# Altium PCB PCB1.PcbDoc
Units mm, origin at the board's own origin, x right, y up, seen from the top; angles counter-clockwise.
Board outline 51.26 x 60.5 mm, 4 copper layers (Component Side, Ground Plane, Power Plane, Solder Side), stack 1.606 mm thick; 65 components, 40 nets, 204 pads, 75 vias.
Unrouted connection lines stored in the file: 7.
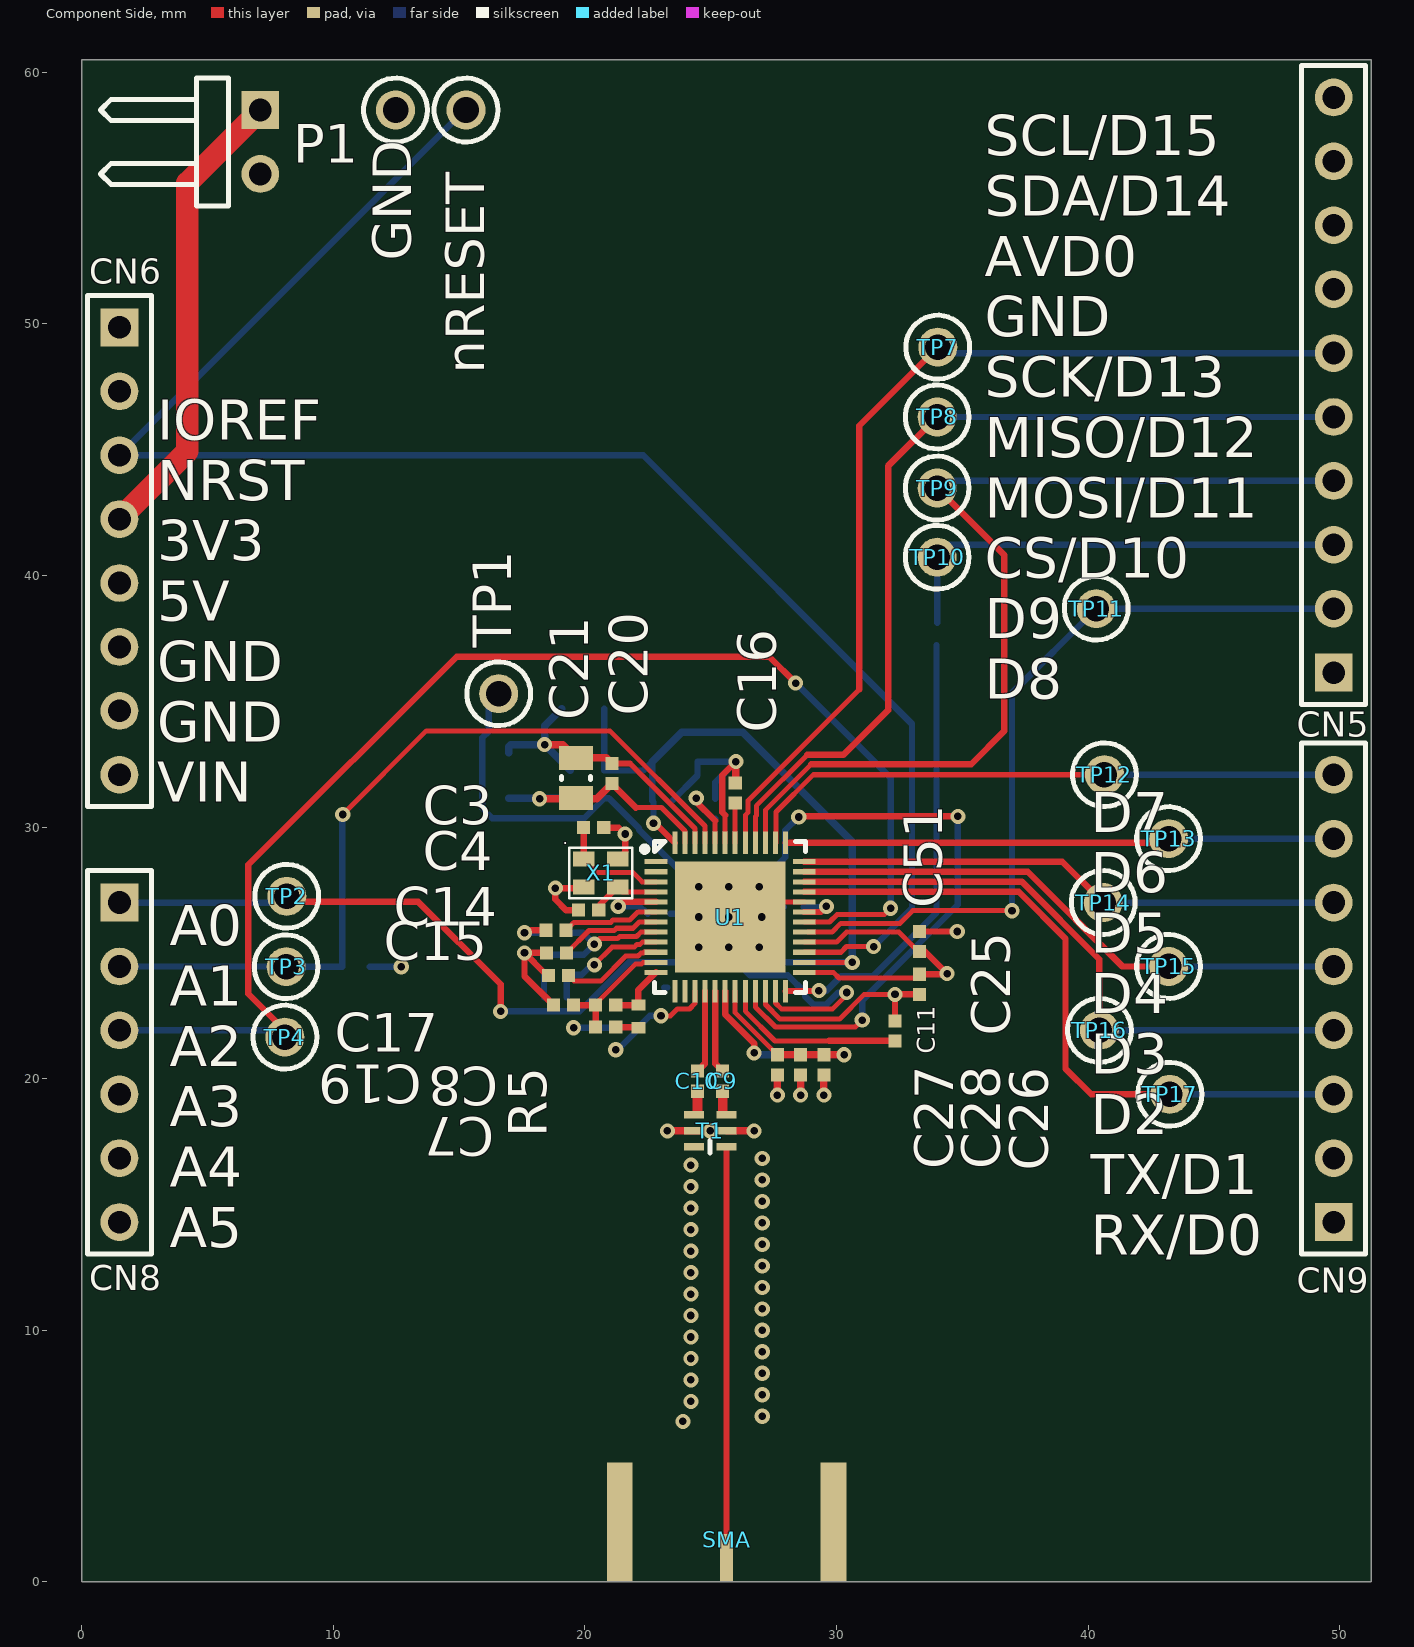
[diagram p0: Component Side view]
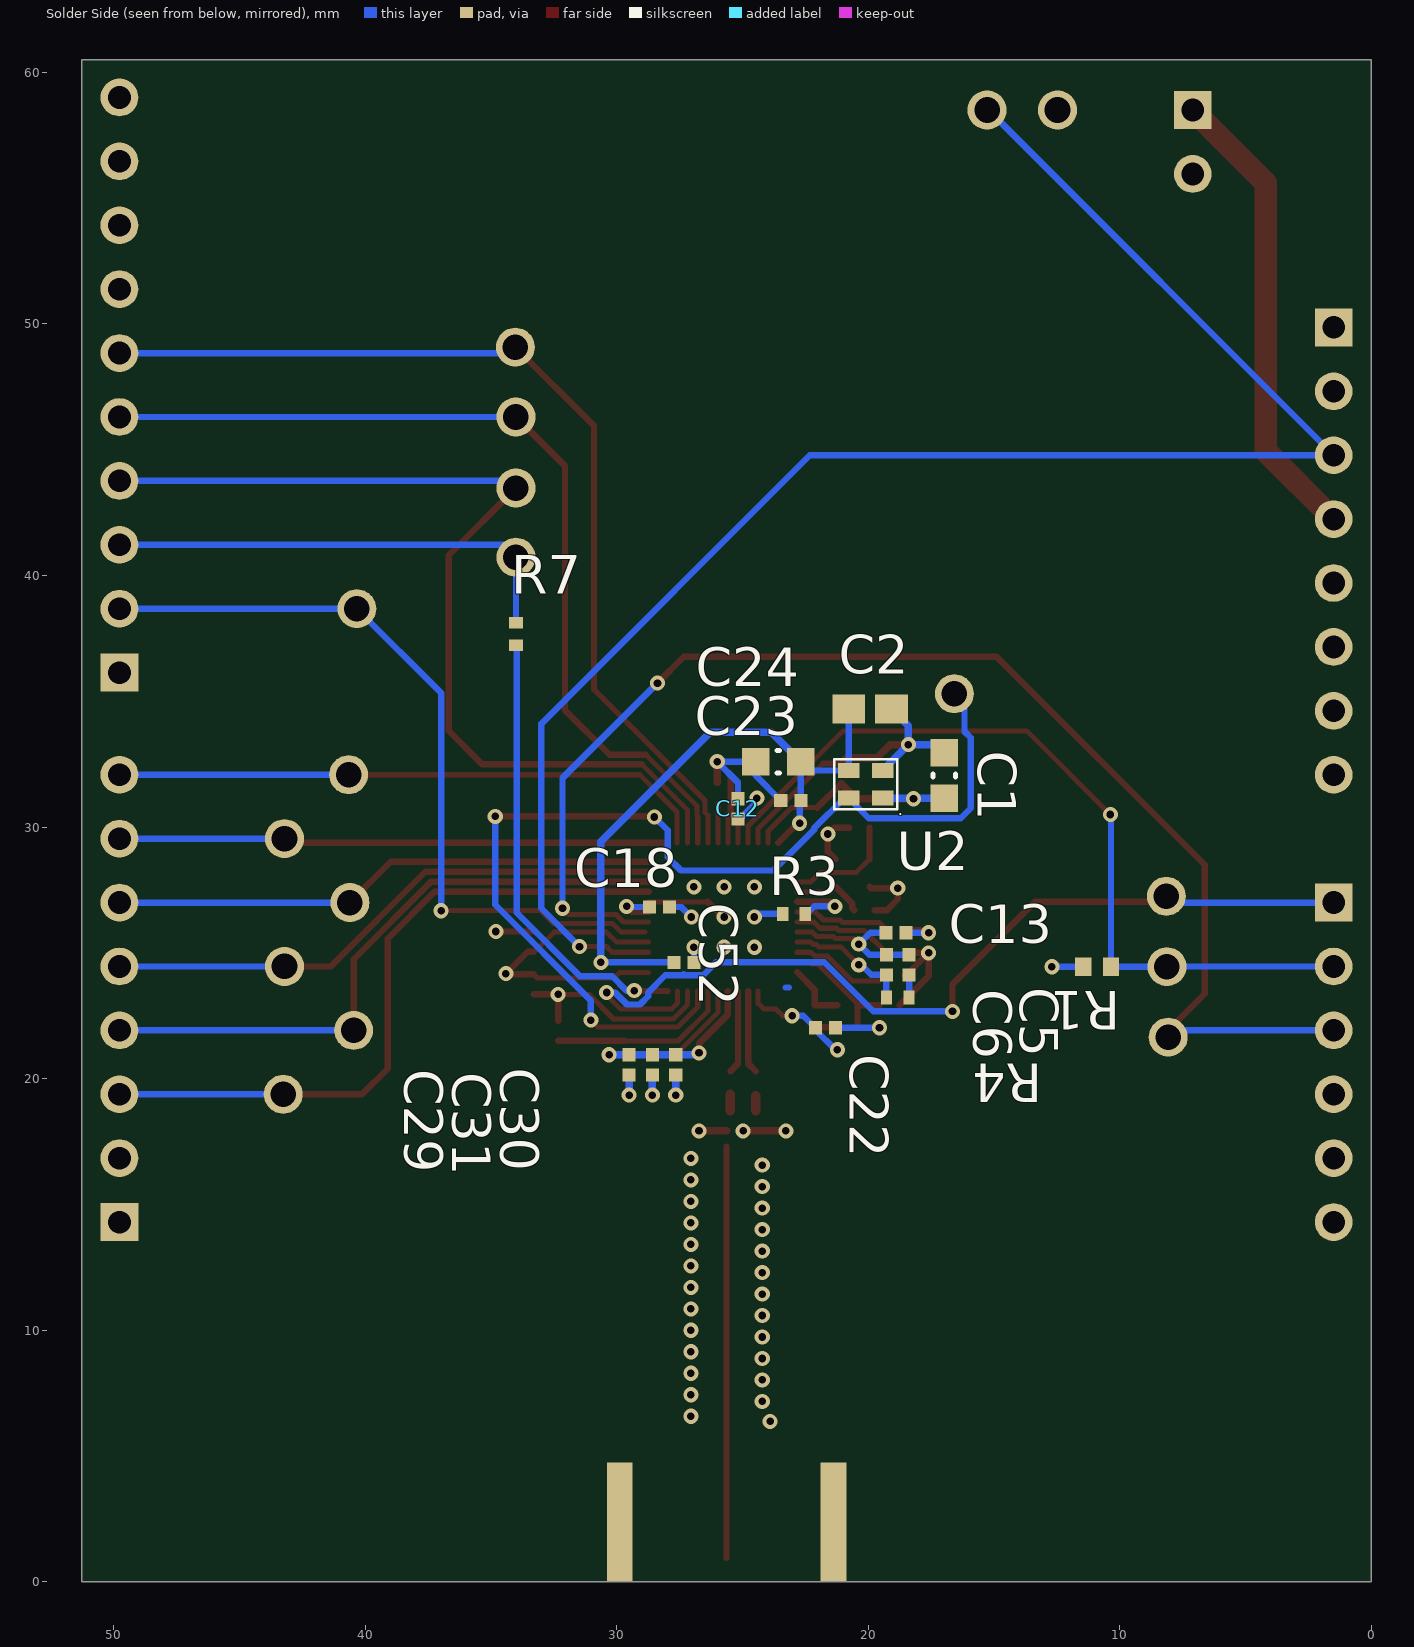
[diagram p1: Solder Side view, seen from below]
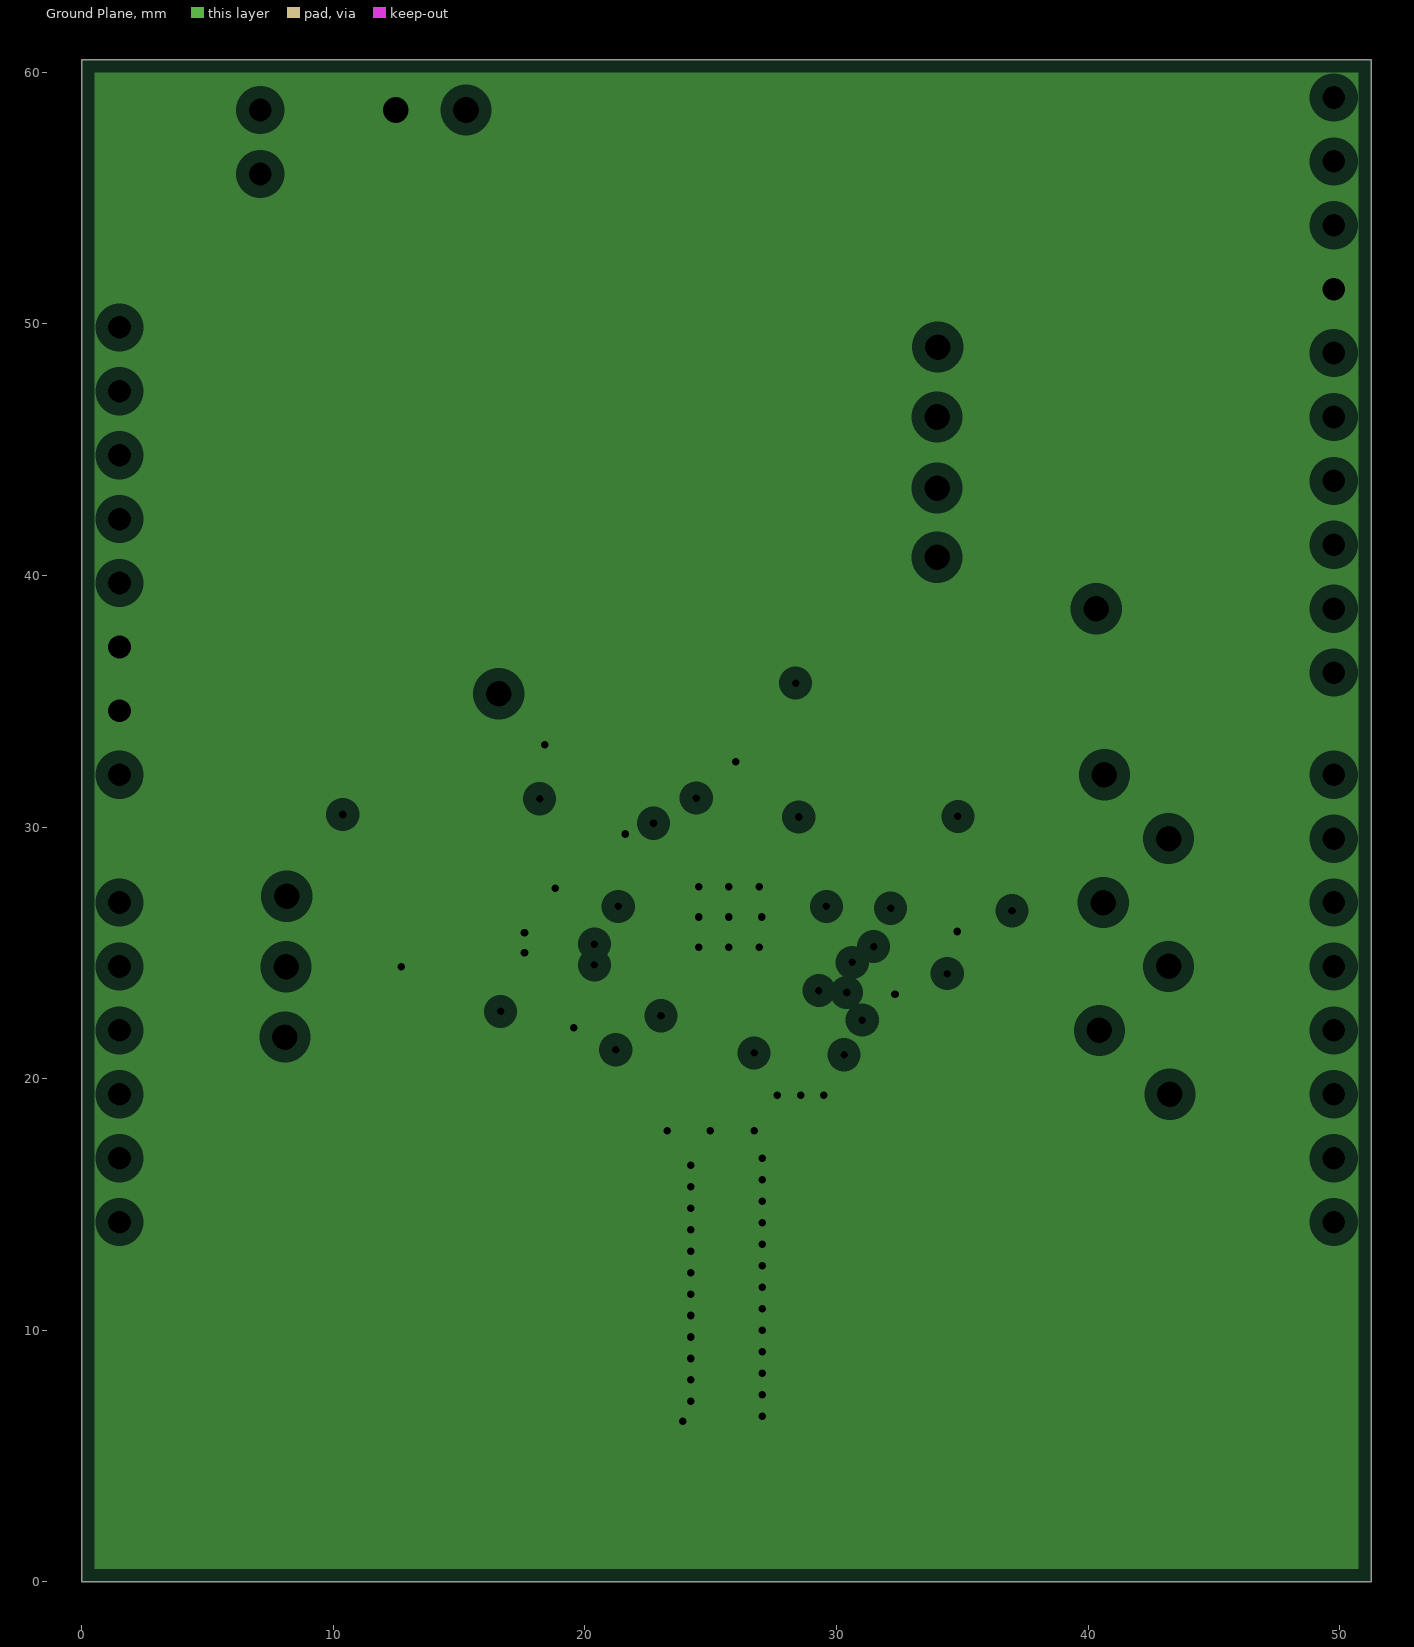
[diagram p2: Ground Plane, clearances drawn from the general rule]
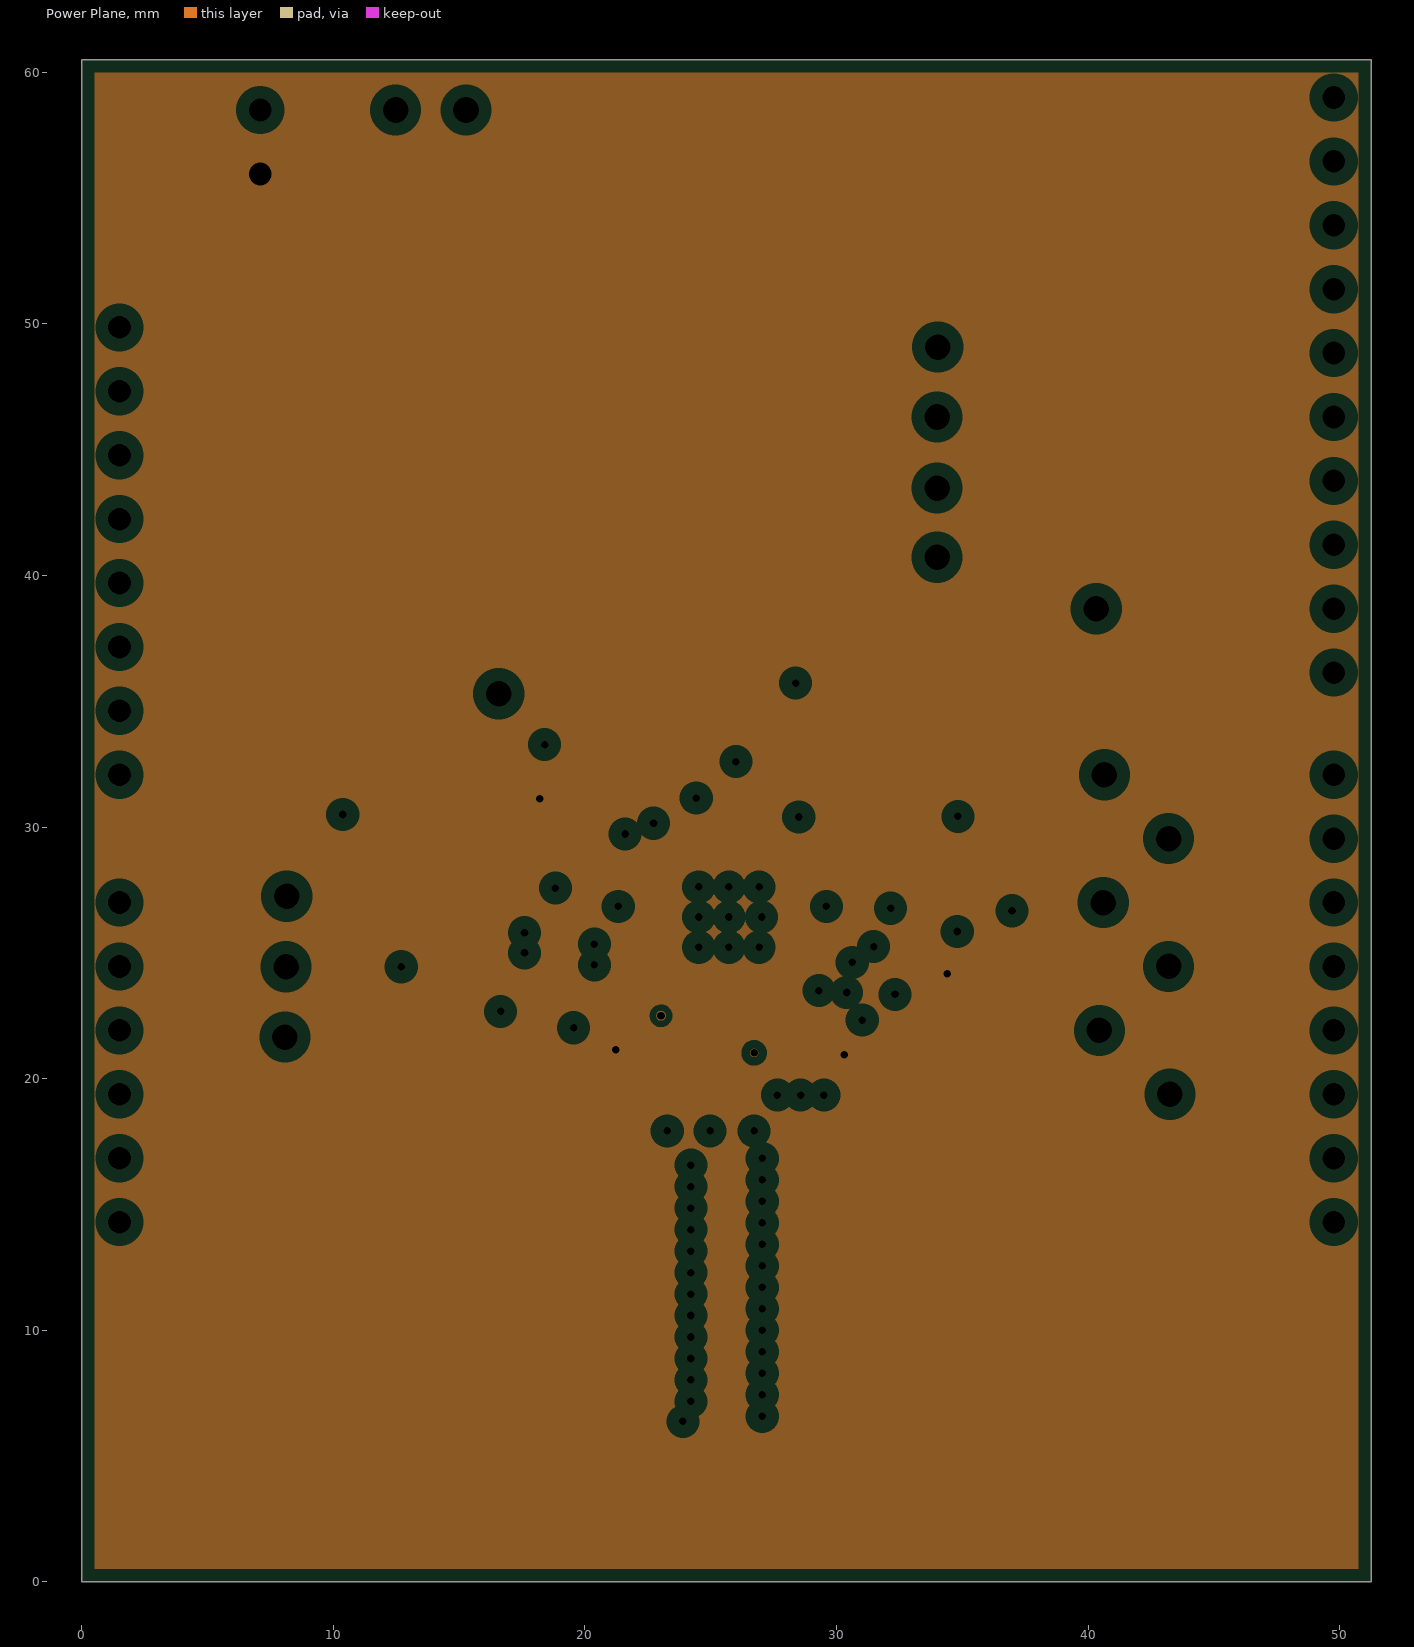
[diagram p3: Power Plane, clearances drawn from the general rule]

## Layer stack, top to bottom
Top Solder: solder mask 0.0102, Solder Resist, Dk 3.5
Component Side: signal copper 0.035
Dielectric 1: core 0.5, FR-4, Dk 4.8
Ground Plane: plane copper 0.018, net GND
Dielectric 3: core 0.5, FR-4, Dk 4.2
Power Plane: plane copper 0.018, net +3V3
Dielectric 4: core 0.5, FR-4, Dk 4.2
Solder Side: signal copper 0.035
Bottom Solder: solder mask 0.0102, Solder Resist, Dk 3.5

## Board outline
0,0 0,60.5 51.26,60.5 51.26,0

## Design rules (kind name [scope] priority, off if disabled: settings)
Clearance [All] p1: gap=0.125 ignorepadtopadclearanceinfootprint=FALSE except(0: Arc-Hole Track-Hole SMDPad-Hole THPad-Hole Via-Hole Fill-Hole Poly-Hole Region-Hole Text-Hole)
DiffPairsRouting [InDifferentialPairClass('All Differential Pairs')] p1: maxlimit=0.254 minlimit=0.254 mostfreqgap=0.254 toplayer_minwidth=0.381 toplayer_maxwidth=0.381 toplayer_prefwidth=0.381 bottomlayer_minwidth=0.381 bottomlayer_maxwidth=0.381 bottomlayer_prefwidth=0.381 maxuncoupledlength=12.7
HoleSize [All] p1: absolutevalues=TRUE maxlimit=0.9 minlimit=0.2 maxpercent=80.000 minpercent=20.000
Length [InNetClass('100ohm CPW')  or InNetClass('50ohm microstrip')] p1: maxlimit=50 minlimit=0
PlaneClearance [All] p1: clearance=0.508
PlaneConnect [All] p1: planeconnectstyle=Direct reliefexpansion=0.508 reliefentries=4 reliefconductorwidth=0.254 reliefairgap=0.254
PolygonConnect [All] p1: connectstyle=Direct reliefconductorwidth=0.254 reliefentries=4 polygonreliefangle="90 Angle" airgapwidth=0.254
RoutingVias [All] p1: holewidth=0.3 width=0.6 viastyle="Through Hole" minholewidth=0.2 minwidth=0.4 maxholewidth=0.9 maxwidth=1.7
SolderMaskExpansion [All] p1: expansion=0.102
UnRoutedNet [All] p1: checkbadconnections=TRUE
Width "100ohm differential" [InNetClass('100ohm cwp')] p1: maxlimit=0.137 minlimit=0.102 preferedwidth=0.137 toplayer_maxwidth=0.102 toplayer_prefwidth=0.102 bottomlayer_minwidth=0.137 impedancedriven=TRUE minimp=100.000000 maximp=100.000000 favimp=100.000000
Width 50ohm_width [InNetClass('50ohm microstrip')] p2: maxlimit=0.777 minlimit=0.696 preferedwidth=0.777 toplayer_maxwidth=0.696 toplayer_prefwidth=0.696 bottomlayer_minwidth=0.777 impedancedriven=TRUE minimp=50.000000 maximp=50.000000 favimp=50.000000
Width [All] p3: maxlimit=0.9 minlimit=0.125 preferedwidth=0.254
25 further rules are at their usual default settings.

## Classes and differential pairs
component class dw1000: C1 C2 C3 C4 C5 C6 C7 C8 C9 C10 C11 C12 C13 C14 C15 C16 C17 C18 C19 C20 C21 C22 C23 C24 C25 C26 C27 C28 C29 C30 C31 C51 C52 R1 R3 R4 R5 R7 SMA T1 TP1 U1 U2 X1
component class pinheader: CN5 CN6 CN8 CN9 GND nRESET P1 TP2 TP3 TP4 TP7 TP8 TP9 TP10 TP11 TP12 TP13 TP14 TP15 TP16 TP17
differential pair class 50ohmdiff: "50ohm pair"
differential pair class 100ohmdiff: "100ohm pair"

## Components (designator, comment, footprint, x,y, rotation, side; value= is the part's Value field where it differs from the comment)
C1 "4.7uF" CAPC0603(1608)100_M 16.975,32.05 r270 bottom
C2 "10µF" CAPC1608X100X35ML20T25 19.925,34.7 r180 bottom
C3 "9pF" CAPC0402(1005)60_L 20.35,29.975 r0 top
C4 "9pF" CAPC0402(1005)60_L 20.15,26.7 r180 top
C5 "27pF" CAPC0402(1005)60_L 18.375,24.525 r270 bottom
C6 "1.2pF" CAPC0402(1005)60_L 19.275,24.525 r270 bottom
C7 "820pF" CAPC0402(1005)60_L 20.825,22.05 r0 top
C8 "18pF" CAPC0402(1005)60_L 20.825,22.925 r180 top
C9 "12pF" CAPC0402(1005)60_L 25.475,19.9 r270 top
C10 "12pF" CAPC0402(1005)60_L 24.475,19.9 r270 top
C11 "100nF" CAPC0402(1005)60_L 32.325,21.9 r90 top
C12 "100nF" CAPC0402(1005)60_L 25.175,30.725 r90 bottom
C13 "100nF" CAPC0402(1005)60_L 18.9,25.8 r180 bottom
C14 "100nF" CAPC0402(1005)60_L 18.85,25.9 r180 top
C15 "100nF" CAPC0402(1005)60_L 18.875,25 r180 top
C16 "100nF" CAPC0402(1005)60_L 25.975,31.35 r90 top
C17 "100nF" CAPC0402(1005)60_L 18.95,24.1 r180 top
C18 "100nF" CAPC0402(1005)60_L 27.325,24.625 r180 bottom
C19 "100nF" CAPC0402(1005)60_L 19.15,22.925 r180 top
C20 "100nF" CAPC0402(1005)60_L 21.075,32.125 r90 top
C21 "47uF" CAPC0805(2012)145_L 19.65,31.95 r270 top
C22 "10nF" CAPC0402(1005)60_L 21.7,22.025 r180 bottom
C23 "100nF" CAPC0402(1005)60_L 23.075,31.05 r0 bottom
C24 "4.7uF" CAPC0603(1608)100_M 23.575,32.6 r180 bottom
C25 "100nF" CAPC0402(1005)60_L 33.3,23.75 r270 top
C26 "100nF" CAPC0402(1005)60_L 29.5,20.55 r270 top
C27 "10pF" CAPC0402(1005)60_L 27.65,20.55 r90 top
C28 "330pF" CAPC0402(1005)60_L 28.575,20.55 r270 top
C29 "100nF" CAPC0402(1005)60_L 29.5,20.55 r270 bottom
C30 "10pF" CAPC0402(1005)60_L 27.65,20.55 r90 bottom
C31 "330pF" CAPC0402(1005)60_L 28.575,20.55 r270 bottom
C51 "10nF" CAPC0402(1005)60_L 33.3,25.45 r90 top
C52 "100nF" CAPC0402(1005)60_L 28.3,26.825 r180 bottom
CN5 "digital" HDR1X10 49.76,36.14 r90 top
CN6 "power" HDR1X8 1.5,49.86 r270 top
CN8 "analog" HDR1X6 1.5,27 r270 top
CN9 "digital" HDR1X8 49.76,14.3 r90 top
GND "Component_1" KSTN-5000#1 12.475,58.5 r0 top (schematic designator TP6)
nRESET "Component_1" KSTN-5000#1 15.275,58.5 r0 top (schematic designator TP5)
P1 "CurrentProbe" HDR1X2H 7.1,58.5 r270 top
R1 "100K 1%" RESC0402(1005)_M 10.9,24.45 r0 bottom value="100000.00 Ohm"
R3 "11K 1%" RESC0402(1005)_L 22.95,26.55 r0 bottom value="11000.00 Ohm"
R4 "16000.00 Ohm" RESC0402(1005)_L 18.825,23.225 r0 bottom
R5 "270.00 Ohm" RESC0402(1005)_L 22.125,22.475 r90 top
R7 "100.00 Ohm" RESC0402(1005)_L 34,37.675 r90 bottom
SMA "0732511150" sma_footprint 25.63,0 r0 top
T1 "HHM1595A1" HHM1595A1 25.605,16.925 r90 top
TP1 "Component_1" KSTN-5000#1 16.575,35.3 r0 top
TP2 "Component_1" KSTN-5000#1 8.15,27.25 r0 top
TP3 "Component_1" KSTN-5000#1 8.125,24.45 r0 top
TP4 "Component_1" KSTN-5000#1 8.075,21.65 r0 top
TP7 "Component_1" KSTN-5000#1 34.025,49.075 r0 top
TP8 "Component_1" KSTN-5000#1 34,46.3 r0 top
TP9 "Component_1" KSTN-5000#1 34,43.475 r0 top
TP10 "Component_1" KSTN-5000#1 34,40.725 r90 top
TP11 "Component_1" KSTN-5000#2 40.325,38.7 r90 top
TP12 "Component_1" KSTN-5000#1 40.65,32.08 r90 top
TP13 "Component_1" KSTN-5000#1 43.2,29.54 r90 top
TP14 "Component_1" KSTN-5000#1 40.6,27 r90 top
TP15 "Component_1" KSTN-5000#1 43.2,24.46 r90 top
TP16 "Component_1" KSTN-5000#1 40.45,21.92 r90 top
TP17 "Component_1" KSTN-5000#1 43.25,19.38 r90 top
U1 "DW1000 IC" QFN-48 25.775,26.425 r0 top
U2 "81-LXDC2HL18A-052" PCBComponent_1 18.85,32.7 r0 bottom
X1 "38.4MHz" PCBComponent_1 19.375,27.175 r0 top

## Footprints (in the part's own frame and the unit in brackets; to place one, negate y for a bottom-side part, rotate by r counter-clockwise, add the part's x,y. Pads: shape width x height; smd on the part's side, far side on the other; paste and mask are expansions set on the pad)
CAPC0402(1005)60_L [mm] "Chip Capacitor, Body 1.0x0.5mm, Height 0.6mm, IPC High Density"
  rect 0.52x0.52 smd: 1(-0.4,0) 2(0.4,0)
  body extent -0.55,-0.3 0.55,0.3, height 0.6
CAPC0603(1608)100_M [mm] "Chip Capacitor, Body 1.6x0.8mm, Height 1.0mm, IPC Low Density"
  rect 1.1x1.1 smd: 1(-0.9,0) 2(0.9,0)
  silkscreen extent -0.05,-0.45 0.05,0.45, body extent -0.87,-0.47 0.88,0.48, height 1
CAPC0805(2012)145_L [mm] "Chip Capacitor, Body 2.0x1.2mm, Height 1.45mm, IPC High Density"
  rect 0.95x1.35 smd: 1(-0.8,0) 2(0.8,0)
  silkscreen extent -0.05,-0.58 0.05,0.58, body extent -1.1,-0.72 1.1,0.72, height 1.45
CAPC1608X100X35ML20T25 [mm] "Chip Capacitor, 2-Leads, Body 1.80x1.00mm, IPC Low Density"
  rect 1.3x1.15 smd: 1(-0.85,0) 2(0.85,0)
  body extent -0.9,-0.5 0.9,0.5, height 1
HDR1X2H [mm] "Connector; Header; 2 Position; Right Angle"
  rect 1.5x1.5 hole 0.9: 1(0,0)
  round 1.5 hole 0.9: 2(2.54,0)
  silkscreen extent -1.27,-6.35 3.81,-1.27
HDR1X6 [mm] "Connector; Header; 6 Position"
  rect 1.5x1.5 hole 0.9: 1(0,0)
  round 1.5 hole 0.9: 2(2.54,0) 3(5.08,0) 4(7.62,0) 5(10.16,0) 6(12.7,0)
  silkscreen extent -1.27,-1.27 13.97,1.27
HDR1X8 [mm] "Connector; Header; 8 Position"
  rect 1.5x1.5 hole 0.9: 1(0,0)
  round 1.5 hole 0.9: 2(2.54,0) 3(5.08,0) 4(7.62,0) 5(10.16,0) 6(12.7,0) 7(15.24,0) 8(17.78,0)
  silkscreen extent -1.27,-1.27 19.05,1.27
HDR1X10 [mm] "Connector; Header; 10 Position"
  rect 1.5x1.5 hole 0.9: 1(0,0)
  round 1.5 hole 0.9: 2(2.54,0) 3(5.08,0) 4(7.62,0) 5(10.16,0) 6(12.7,0) 7(15.24,0) 8(17.78,0) 9(20.32,0) 10(22.86,0)
  silkscreen extent -1.27,-1.27 24.13,1.27
HHM1595A1 [mm]
  rect 0.3x0.8 smd: 1(0.375,-0.025) 2(1,-0.025) 3(1.65,-0.025) 4(1.65,1.275) 5(1,1.275) 6(0.375,1.275)
  silkscreen extent 0.13,0.63 0.63,0.63, body extent 0,0 2,1.25, height 0.8
KSTN-5000#1 [mm] "Test Point, Through Hole, Dia 2.54 mm"
  round 1.55 hole 1.016: 1(0,0)
  silkscreen extent -1.27,-1.27 1.27,1.27, body extent -1.25,-1.25 1.25,1.25, height 4.62
KSTN-5000#2 [mm] "Test Point, Through Hole, Dia 2.54 mm"
  round 1.55 hole 1.016: 1(-0.02,0)
  silkscreen extent -1.27,-1.27 1.27,1.27, body extent -1.25,-1.25 1.25,1.25, height 4.62
PCBComponent_1 [mm]
  rect 0.85x0.6 smd: 1(0.575,1.55) 2(1.925,1.55) 3(1.925,0.45) 4(0.575,0.45)
  silkscreen extent 0,0 2.5,2
QFN-48 [mm] "48 Pin QFN"
  rect 0.9x0.2 smd mask+0.05: 1(-2.95,2.2) 2(-2.95,1.8) 3(-2.95,1.4) 4(-2.95,1) 5(-2.95,0.6) 6(-2.95,0.2) 7(-2.95,-0.2) 8(-2.95,-0.6) 9(-2.95,-1) 10(-2.95,-1.4) 11(-2.95,-1.8) 12(-2.95,-2.2) 25(2.95,-2.2) 26(2.95,-1.8) 27(2.95,-1.4) 28(2.95,-1) 29(2.95,-0.6) 30(2.95,-0.2) 31(2.95,0.2) 32(2.95,0.6) 33(2.95,1) 34(2.95,1.4) 35(2.95,1.8) 36(2.95,2.2)
  rect 0.2x0.9 smd mask+0.05: 13(-2.2,-2.95) 14(-1.8,-2.95) 15(-1.4,-2.95) 16(-1,-2.95) 17(-0.6,-2.95) 18(-0.2,-2.95) 19(0.2,-2.95) 20(0.6,-2.95) 21(1,-2.95) 22(1.4,-2.95) 23(1.8,-2.95) 24(2.2,-2.95) 37(2.2,2.95) 38(1.8,2.95) 39(1.4,2.95) 40(1,2.95) 41(0.6,2.95) 42(0.2,2.95) 43(-0.2,2.95) 44(-0.6,2.95) 45(-1,2.95) 46(-1.4,2.95) 47(-1.8,2.95) 48(-2.2,2.95)
  rect 4.4x4.4 smd paste-4.4 mask+0.05: 49(0,0)
  rect 1.3x1.3 on Top Paste mask+0.05: Paste1(0,0) Paste2(-1.45,1.45) Paste3(-1.45,-1.45) Paste4(1.45,-1.45) Paste5(1.45,1.45) Paste6(1.45,0) Paste7(-1.45,0) Paste8(0,1.45) Paste9(0,-1.45)
  silkscreen extent -3.5,-3 3,3, body extent -3,-3 3,3, height 1
RESC0402(1005)_L [mm] "Chip Resistor, Body 1.0x0.5mm, IPC High Density"
  rect 0.45x0.55 smd: 1(-0.45,0) 2(0.45,0)
  body extent -0.52,-0.27 0.53,0.28, height 0.4
RESC0402(1005)_M [mm] "Chip Resistor, Body 1.0x0.5mm, IPC Low Density"
  rect 0.65x0.75 smd: 1(-0.55,0) 2(0.55,0)
  body extent -0.52,-0.28 0.53,0.28, height 0.4
sma_footprint [mm]
  rect 1.02x4.75 smd far side: G(-4.25,2.375) G(4.25,2.375)
  rect 1.02x4.75 smd: G(-4.25,2.375) G(4.25,2.375)
  rect 0.51x1.91 smd: S(0,0.955)

## Part data
C1 C24: library part CMP-1035-02780-1, "CAP 4.7uF 6.3V ±10% 0603 (1608 Metric) Thickness 1mm SMD", Case-EIA=0603, Case-Metric=1608, Rated Voltage="6.3 V", Tolerance=±10%, Max Thickness="1 mm", Technology=SMT
C2: library part CMP-2000-05443-1, "High Value Multilayer Ceramic Capacitor, 10 uF, +/- 20%, 10 V, -55 to 85 degC, 0603 (1608 Metric), RoHS, Tape and Reel", Manufacturer="Taiyo Yuden", Operating Temperature=-55degC~85degC, Package / Case=0603(1608Metric), Package Description="2-Pin Surface Mount Device, Body 1.70 x 0.90 mm", Package Reference=603, Ratings=-, Standard Package=1, Temperature Coefficient=X5R, Tolerance=±20%, Voltage - Rated=10V, Applications=GeneralPurpose, Capacitance=10µF, Catalog Drawings=xMKSeries_0603_0.8, Category=Capacitors, Datasheet URL=https://datasheet.ciiva.com/15921/288lmk107bbj106malt-15921300.pdf, Datasheet Version=Apr-14, Family=CeramicCapacitors, Featured Product=MultilayerChipCapacitors, Features=-, Height - Seated (Max)=-, Lead Spacing=-, Lead Style=-, Manufacturer URL=http://www.t-yuden.com/, Mounting Type=SurfaceMount,MLCC, Online Catalog=MSeries, Other Names=587-2562-6, Packaging=Digi-Reel, Series=M, Size / Dimension="0.063\"Lx0.031\"W(1.60mmx0.80mm)", Thickness (Max)="0.035\"(0.90mm)"
C3 C4: library part CMP-1034-00643-1, "CAP 9pF 50V ±0.05pF 0402 (1005 Metric) Thickness 0.6mm SMD", Case-EIA=0402, Case-Metric=1005, Rated Voltage="50 V", Tolerance=±0.05pF, Max Thickness="0.6 mm", Technology=SMT
C5: library part CMP-1034-00961-1, "CAP 27pF 50V ±2% 0402 (1005 Metric) Thickness 0.6mm SMD", Case-EIA=0402, Case-Metric=1005, Rated Voltage="50 V", Tolerance=±2%, Max Thickness="0.6 mm", Technology=SMT
C6: library part CMP-1034-00083-1, "CAP 1.2pF 50V ±0.05pF 0402 (1005 Metric) Thickness 0.6mm SMD", Case-EIA=0402, Case-Metric=1005, Rated Voltage="50 V", Tolerance=±0.05pF, Max Thickness="0.6 mm", Technology=SMT
C7: library part CMP-1034-01592-1, "CAP 820pF 50V ±2% 0402 (1005 Metric) Thickness 0.6mm SMD", Case-EIA=0402, Case-Metric=1005, Rated Voltage="50 V", Tolerance=±2%, Max Thickness="0.6 mm", Technology=SMT
C8: library part CMP-1034-00863-1, "CAP 18pF 50V ±2% 0402 (1005 Metric) Thickness 0.6mm SMD", Case-EIA=0402, Case-Metric=1005, Rated Voltage="50 V", Tolerance=±2%, Max Thickness="0.6 mm", Technology=SMT
C9 C10: library part CMP-1034-00768-1, "CAP 12pF 50V ±2% 0402 (1005 Metric) Thickness 0.6mm SMD", Case-EIA=0402, Case-Metric=1005, Rated Voltage="50 V", Tolerance=±2%, Max Thickness="0.6 mm", Technology=SMT
C11 C12 C13 C14 C15 C16 C17 C18 C19 C20 C23 C25 C26 C29 C52: library part CMP-1034-02069-1, "CAP 100nF 16V ±10% 0402 (1005 Metric) Thickness 0.6mm SMD", Case-EIA=0402, Case-Metric=1005, Rated Voltage="16 V", Tolerance=±10%, Max Thickness="0.6 mm", Technology=SMT
C21: library part CMP-1036-04950-1, "CAP 47uF 6.3V ±20% 0805 (2012 Metric) Thickness 1.45mm SMD", Case-EIA=0805, Case-Metric=2012, Rated Voltage="6.3 V", Tolerance=±20%, Max Thickness="1.45 mm", Technology=SMT
C22 C51: library part CMP-1034-01880-1, "CAP 10nF 25V ±10% 0402 (1005 Metric) Thickness 0.6mm SMD", Case-EIA=0402, Case-Metric=1005, Rated Voltage="25 V", Tolerance=±10%, Max Thickness="0.6 mm", Technology=SMT
C27 C30: library part CMP-1034-00722-1, "CAP 10pF 50V ±2% 0402 (1005 Metric) Thickness 0.6mm SMD", Case-EIA=0402, Case-Metric=1005, Rated Voltage="50 V", Tolerance=±2%, Max Thickness="0.6 mm", Technology=SMT
C28 C31: library part CMP-1034-01432-1, "CAP 330pF 50V ±2% 0402 (1005 Metric) Thickness 0.6mm SMD", Case-EIA=0402, Case-Metric=1005, Rated Voltage="50 V", Tolerance=±2%, Max Thickness="0.6 mm", Technology=SMT
CN5: library part "Header 10", "Header, 10-Pin", LatestRevisionDate=17-Jul-2002, LatestRevisionNote="Re-released for DXP Platform.", Publisher="Altium Limited"
CN6 CN9: library part "Header 8", "Header, 8-Pin", LatestRevisionDate=17-Jul-2002, LatestRevisionNote="Re-released for DXP Platform.", Publisher="Altium Limited"
CN8: library part "Header 6", "Header, 6-Pin", LatestRevisionDate=17-Jul-2002, LatestRevisionNote="Re-released for DXP Platform.", Publisher="Altium Limited"
GND nRESET TP1 TP2 TP3 TP4 TP7 TP8 TP9 TP10 TP11 TP12 TP13 TP14 TP15 TP16 TP17: "test point"
P1: library part "Header 2H", "Header, 2-Pin, Right Angle", LatestRevisionDate=17-Jul-2002, LatestRevisionNote="Re-released for DXP Platform.", Publisher="Altium Limited"
R1: library part CMP-1011-00736-1, "100K 0.063W 1% 0402 (1005 Metric)  SMD", Case-EIA=0402, Case-Metric=1005, Power="0.063 W", Tolerance="1 %", Technology=SMT
R3: library part CMP-1011-00627-1, "11K 0.063W 1% 0402 (1005 Metric)  SMD", Case-EIA=0402, Case-Metric=1005, Power="0.063 W", Tolerance="1 %", Technology=SMT
R4: library part CMP-1011-00644-1, "16K 0.063W 1% 0402 (1005 Metric)  SMD", Case-EIA=0402, Case-Metric=1005, Power="0.063 W", Tolerance="1 %", Technology=SMT
R5: library part CMP-1011-00444-1, "270R 0.063W 1% 0402 (1005 Metric)  SMD", Case-EIA=0402, Case-Metric=1005, Power="0.063 W", Tolerance="1 %", Technology=SMT
R7: library part CMP-1011-00397-1, "100R 0.063W 1% 0402 (1005 Metric)  SMD", Case-EIA=0402, Case-Metric=1005, Power="0.063 W", Tolerance="1 %", Technology=SMT
SMA: "CONN SMA JACK 50 OHM EDGE MNT", Dielectric Material="Polytetrafluoroethylene (PTFE)", Frequency - Max=18GHz, Housing Colour=Gold, Manufacturer="Molex, LLC", Operating Temperature="-65C ~ 165C", Supplier Part Number 1=WM5534-ND, Voltage Rating=500V, Body Finish=Gold, Body Material=Brass, Cable Group=-, Center Contact Material="Beryllium Copper", Center Contact Plating=Gold, ComponentLink1Description=Datasheet, ComponentLink1URL=http://www.molex.com/pdm_docs/sd/732511150_sd.pdf, ComponentLink2Description="Digi-Key Listing", ComponentLink2URL=http://www.digikey.ca/product-detail/en/molex-llc/0732511150/WM5534-ND/1465156, Contact Termination=Solder, Fastening Type=Threaded, Features=-, Impedance="50 Ohm", Ingress Protection=-, Mounting Type="Board Edge, End Launch", PartId=21185, Part Number=0732511150, Price=4.81, Series=73251, Shield Termination=Solder, Style=SMA, Supplier 1=Digi-Key, Type="Receptacle, Female Socket"
T1: "HHM1595A1 3000MHz - 8000MHz 0805", Category=Filter, Category Letter=T, Part Number=HHM1595A1
U1: library part DW1000_QFN_48, "UWB DW1000", Manufacturer="Decawave Ltd.", Part Number=DW1000_QFN, Component Code=n/a, ComponentLink1Description="Datasheet Link", Component Type=Standard
U2 X1: library part Component_1
  U2: Supplier 1=Mouser, Supplier Part Number 1=81-LXDC2HL18A-052

## Via types
v1: diameter 0.6, hole 0.3, Component Side to Solder Side, 75 vias

## Nets (pads, with @x,y where several pads share a name; then routed paths per layer and width w, separated by ;. In a path a pad name is that pad's centre, name@x,y a point inside that pad or via, vN(x,y) a via of type N, cw(c..) or ccw(c..) an arc to the next point about the centre after c; other vN are vias at no path point)
+1V8: C2.1 C18.1 C23.1 C24.2 U1.26 U1.48 U2.3 | length 28
  Component Side w0.2: U1.26 v1(30.625,24.625)
  Component Side w0.254: v1(22.726,30.151) 22.799,30.151 U1.48
  Solder Side w0.254: C2.1 U2.3 22.325,32.25 C24.2 C23.1 22.726,30.999 v1(22.726,30.151) ; C18.1 v1(30.625,24.625)
  Solder Side w0.3: C24.2 23.85,33.775 26.275,33.775 30.625,29.425 v1(30.625,24.625)
+3V3: C1.2 C20.1 C21.2 C22.1 C25.1 C26.1 C27.2 C28.1 C29.1 C30.2 C31.1 C51.1 P1.2 U1.15 U1.18 U1.19 U1.25 U1.28 U1.47 U2.1 | length 38.8
  Component Side w0.2: 22.025,30.775 23.043,30.775 23.975,29.843 U1.47 ; v1(23.025,22.5) 23.4,22.5 23.673,22.773 24.154,22.773 24.375,22.994 U1.15 ; U1.19 25.975,22.625 C27.2 ; U1.25 29.875,24.225 30.102,23.998 33.148,23.998 C25.1 ; U1.28 30,25.425 30.4,25.825 32.483,25.825 C51.1@33.182,25.126
  Component Side w0.254: C20.1 22.025,30.775 ; U1.18 25.575,22.55 26.725,21.4 v1(26.725,21.025) ; C25.1 34.375,24.15 v1(34.4,24.175) 33.525,25.05 C51.1
  Component Side w0.3: v1(18.2,31.125) 20.475,31.125 C20.1 ; C27.2@27.675,20.95 C28.1 C26.1 v1(30.3,20.95)
  Solder Side w0.254: v1(21.225,21.15) 21.301,21.15 22.1,21.949 C22.1 22.575,22.5 v1(23.025,22.5)
  Solder Side w0.3: C1.2 U2.1 ; v1@26.725,20.95 C31.1 C29.1 v1(30.3,20.95) ; v1(26.725,21.025) v1@26.8,21.025
GND: C1.1 C2.2 C3.2 C4.2 C11.2 C12.2 C13.2 C14.2 C15.2 C16.2 C17.2 C18.2 C19.2 C20.2 C21.1 C22.2 C23.2 C24.1 C25.2 C26.2 C27.1 C28.2 C29.2 C30.1 C31.2 C51.2 C52.2 CN5.7 CN6.6 CN6.7 GND.1 R1.2 R3.2 SMA.G T1.2 T1.5 U1.22 U1.32 U1.43 U1.46 U1.49 U2.4 X1.2 X1.4 | length 60.3
  Component Side w0.2: 21.791,32.525 24.375,29.941 U1.46 ; U1.43 25.575,30.474 ; U1.49@26.375,27.025 U1.32 ; U1.22 27.175,22.947 27.747,22.375 30.125,22.375 31.1,23.35 v1(32.325,23.35)
  Component Side w0.254: v1(17.6,25.8) 17.7,25.9 C14.2 ; C15.2 v1(17.6,25) ; C17.2 18.475,24.175 18.425,24.175 v1(17.6,25) ; C19.2 17.6,24.075 v1(17.6,25) ; C4.2 19.25,26.7 18.825,27.125 v1(18.825,27.575) 19.9,27.575 X1.4 ; C3.2 21.35,29.975 v1(21.6,29.725) 21.6,29.025 X1.2 ; C20.2 21.791,32.525 ; 25.575,30.474 25.463,30.586 25.463,32.063 v1(26,32.6) ; U1.49 U1.49@26.375,27.025 ; C16.2 C16.2@26,31.775 ; C11.2 v1(32.325,23.35) C25.2 ; C51.2 v1(34.8,25.85)
  Component Side w0.3: v1(18.4,33.275) 19.125,33.275 C21.1 20.85,32.75 C20.2 ; v1(23.275,17.925) T1.5 v1(24.975,17.925) ; T1.2 v1(26.725,17.925) ; C16.2@26,31.775 v1(26,32.6) ; v1(27.65,19.35) C27.1 ; v1(28.575,19.35) C28.2 ; v1(29.5,19.35) C26.2
  Solder Side w0.254: R1.2 v1(12.7,24.45) ; v1(17.6,25.8) C13.2 ; v1(19.55,22.025) C22.2 ; 23.15,23.625 23.275,23.625 ; R3.2 24.4,26.55 v1(24.525,26.425) ; C23.2 24.475,32.05 C24.1 v1(26,32.6) 25.175,31.775 C12.2 ; C18.2 v1(26.925,25.225) ; v1(27.025,26.425) 27.425,26.825 C52.2
  Solder Side w0.3: C1.1 16.975,33.2 17.05,33.275 v1(18.4,33.275) ; C2.2 18.4,34.025 v1(18.4,33.275) ; U2.4 v1(18.4,33.275) ; v1(27.65,19.35) C30.1 ; v1(28.575,19.35) C31.2 ; v1(29.5,19.35) C29.2
  other v1: 23.896,6.377 27.048,6.583 24.212,7.17 27.048,7.437 24.212,8.024 27.048,8.291 24.212,8.878 27.048,9.145 24.212,9.732 27.048,9.999 24.212,10.586 27.048,10.853 24.212,11.44 27.048,11.707 24.212,12.294 27.048,12.561 24.212,13.148 27.048,13.415 24.212,14.002 27.048,14.269 24.212,14.856 27.048,15.123 24.212,15.71 27.048,15.977 24.212,16.564 27.048,16.831 24.525,25.225 25.725,25.225 25.725,26.425 24.525,27.625 25.725,27.625 26.925,27.625
NetC3_1: C3.1 U1.3 X1.1 | length 4.5
  Component Side w0.2: X1.1 20.475,28.2 21.9,28.2 22.275,27.825 U1.3
  Component Side w0.254: X1.1 C3.1
NetC4_1: C4.1 U1.4 X1.3 | length 2.8
  Component Side w0.2: X1.3 21.5,27.425 U1.4
  Component Side w0.254: C4.1 20.627,26.777 20.627,26.952 X1.3
NetC5_2: C5.2 R4.1 | length 0.9
  Solder Side w0.254: R4.1 C5.2
NetC6_2: C6.2 R4.2 U1.9 | length 5
  Component Side w0.2: v1(20.375,24.525) 21.076,25.226 21.962,25.226 22.065,25.329 22.184,25.329 22.28,25.425 U1.9
  Solder Side w0.254: R4.2 C6.2 19.875,24.125 20.275,24.525 v1(20.375,24.525)
NetC7_2: C7.2 R5.1 | length 0.9
  Component Side w0.254: C7.2 22.1,22.05 R5.1
NetC8_1: C8.1 R5.2 U1.12 | length 2.5
  Component Side w0.254: C8.1 R5.2 22.125,23.525 U1.12
NetC9_1: C9.1 U1.17 | length 3.3
  Component Side w0.254: U1.17 25.175,20.6 C9.1
NetC9_2: C9.2 T1.3 | length 0.6
  Component Side w0.381: 25.475,18.73 C9.2@25.475,19.375
NetC10_1: C10.1 U1.16 | length 3.3
  Component Side w0.254: C10.1 24.775,20.6 U1.16
NetC10_2: C10.2 T1.4 | length 0.6
  Component Side w0.381: T1.4@24.475,18.72 C10.2@24.475,19.325
NetCN5_2: CN5.2 TP11.1 U1.29 | length 31.3
  Component Side w0.2: U1.29@28.875,25.825 29.821,25.825 30.171,26.175 32.525,26.175 33.025,26.675 v1(36.975,26.675)
  Solder Side w0.254: v1(36.975,26.675) 36.975,35.33 TP11.1 CN5.2
NetCN5_3: CN5.3 R7.2 TP10.1 | length 18.6
  Component Side w0.254: CN5.3@49.74,41.2 CN5.3
  Solder Side w0.254: R7.2 TP10.1 34.495,41.22 CN5.3
NetCN5_4: CN5.4 TP9.1 U1.39 | length 38.7
  Component Side w0.2: U1.39@27.173,29.375 27.173,30.671 29.002,32.5
  Component Side w0.254: 29.002,32.5 35.35,32.5 36.675,33.825 36.675,40.8 TP9.1
  Solder Side w0.254: TP9.1 34.285,43.76 CN5.4
NetCN5_5: CN5.5 TP8.1 U1.40 | length 36.5
  Component Side w0.2: U1.40 26.775,30.414 26.812,30.451 26.812,30.846 28.845,32.879
  Component Side w0.254: 28.845,32.879 30.279,32.879 32.05,34.65 32.05,44.35 TP8.1
  Solder Side w0.254: TP8.1 CN5.5
NetCN5_6: CN5.6 TP7.1 U1.41 | length 38.7
  Component Side w0.2: U1.41 26.375,30.474 26.487,30.586 26.487,31.057 30.9,35.47
  Component Side w0.254: 30.9,35.47 30.9,45.95 TP7.1
  Solder Side w0.254: TP7.1 34.26,48.84 CN5.6
NetCN6_3: CN6.3 nRESET.1 U1.27 | length 67.7
  Component Side w0.2: U1.27 30.175,25.025 30.4,25.25 v1(31.475,25.25)
  Solder Side w0.254: nRESET.1 15.22,58.5 CN6.3 22.32,44.78 33,34.1 33,26.775 v1(31.475,25.25)
NetCN6_4: CN6.4 P1.1 | length 18.6
  Component Side w0.9: CN6.4 4.2,44.94 4.2,55.6 P1.1
NetCN8_1: CN8.1 TP2.1 U1.23 | length 36.9
  Component Side w0.2: U1.23 27.575,23.007 27.807,22.775 29.85,22.775 v1@30.45,23.375
  Component Side w0.254: TP2.1@8.125,27 8.15,27 8.175,27.025 13.375,27.025 16.65,23.75 v1(16.65,22.675)
  Solder Side w0.254: CN8.1 8.125,27 TP2.1@8.15,27.025 ; v1(16.65,22.675) 19.8,22.675 21.75,24.625 26.049,24.625 26.561,24.113 27.289,24.113 27.325,24.149 27.361,24.113 28.062,24.113 28.748,23.427 28.748,23.271 29.071,22.948 29.588,22.948 30.065,23.425 v1(30.4,23.425)
NetCN8_2: CN8.2 R1.1 TP3.1 U1.45 | length 32.9
  Component Side w0.2: v1(10.375,30.5) 13.7,33.825 20.989,33.825 24.775,30.039 U1.45
  Component Side w0.254: TP3.1@8.115,24.46 TP3.1
  Solder Side w0.254: CN8.2 8.115,24.46 TP3.1 R1.1 10.35,30.475 v1(10.375,30.5)
NetCN8_3: CN8.3 TP4.1 U1.30 | length 53.9
  Component Side w0.2: U1.30 29.723,26.225 30.025,26.527 31.902,26.527 v1(32.15,26.775)
  Component Side w0.254: TP4.1 8.075,21.925 6.625,23.375 6.625,28.5 14.9,36.775 27.325,36.775 v1(28.375,35.725)
  Solder Side w0.254: CN8.3 8.03,21.92 8.075,21.875 TP4.1@8.125,21.875 ; v1(28.375,35.725) 32.15,31.95 v1(32.15,26.775)
NetCN9_3: CN9.3 TP17.1 U1.33 | length 27.4
  Component Side w0.254: U1.33 37.239,27.425 39.1,25.564 39.1,20.4 40.12,19.38 TP17.1
  Solder Side w0.254: TP17.1 CN9.3
NetCN9_4: CN9.4 TP16.1 U1.34 | length 25.1
  Component Side w0.254: U1.34 37.375,27.825 40.45,24.75 TP16.1
  Solder Side w0.254: TP16.1 CN9.4
NetCN9_5: CN9.5 TP15.1 U1.35 | length 22.6
  Component Side w0.254: U1.35 37.6,28.225 41.365,24.46 TP15.1
  Solder Side w0.254: TP15.1 CN9.5
NetCN9_6: CN9.6 TP14.1 U1.36 | length 21.7
  Component Side w0.254: U1.36 38.975,28.625 TP14.1
  Solder Side w0.254: TP14.1 CN9.6
NetCN9_7: CN9.7 TP13.1 U1.37 | length 22
  Component Side w0.254: U1.37 TP13.1@43.035,29.375 ; TP13.1@43.2,29.375 TP13.1@43.035,29.375 ; TP13.1 TP13.1@43.035,29.375
  Solder Side w0.254: TP13.1 CN9.7
NetCN9_8: CN9.8 TP12.1 U1.38 | length 24
  Component Side w0.2: U1.38@27.597,29.375 27.597,30.597 29.08,32.08 TP12.1
  Solder Side w0.254: TP12.1 CN9.8
NetR3_1: R3.1 U1.5 | length 2.9
  Component Side w0.254: v1(21.325,26.85) 21.5,27.025 U1.5
  Solder Side w0.254: v1(21.325,26.85) 22.15,26.85 22.35,26.65 22.375,26.675 R3.1
NetR7_1: R7.1 U1.24 | length 17.9
  Component Side w0.254: U1.24 v1(29.3,23.5)
  Solder Side w0.254: v1(29.3,23.5) 29.604,23.5 30.177,24.073 31.454,24.073 33.975,26.594 R7.1@33.975,37.225
NetSMA_S: SMA.S T1.1 | length 16.3
  Component Side w0.254: SMA.S T1.1
NetTP1_1: TP1.1 U1.21 U2.2 | length 42
  Component Side w0.2: U1.21 26.775,22.849 27.574,22.05 30.75,22.05 v1(31.025,22.325)
  Component Side w0.254: v1(28.5,30.4) 28.525,30.425 v1(34.825,30.425)
  Solder Side w0.254: TP1.1 16.173,34.898 16.173,33.797 15.925,33.549 15.925,30.744 16.321,30.348 19.973,30.348 U2.2 20.956,31.15 22.152,29.954 22.152,29.892 23.769,28.275 27.437,28.275 27.969,28.806 27.969,29.869 v1(28.5,30.4) ; v1(31.025,22.325) 31.025,23.108 34.825,26.908 v1(34.825,30.425)
VDDCLK: C5.1 C6.1 C13.1 U1.8 | length 6.1
  Component Side w0.2: v1(20.375,25.35) 20.59,25.565 21.3,25.565 21.389,25.654 22.05,25.654 22.221,25.825 U1.8
  Solder Side w0.254: C5.1 C6.1 19.95,24.925 v1(20.375,25.35) 19.925,25.8 C13.1
VDDDIG: C11.1 C12.1 U1.20 U1.44 | length 10.6
  Component Side w0.2: U1.44 25.175,30.25 ; U1.20 26.375,22.685 27.56,21.5 29.7,21.5
  Component Side w0.254: v1(24.426,31.152) 24.426,30.999 25.175,30.25 ; 29.7,21.5 29.702,21.502 30.529,21.502 30.531,21.5 C11.1
  Solder Side w0.254: v1(24.426,31.152) v1(24.426,31.152) 24.35,31.074 25.099,30.325 C12.1
VDDIF: C15.1 U1.7 | length 4.1
  Component Side w0.2: C15.1 20.165,25.89 21.165,25.89 21.254,25.979 21.915,25.979 22.161,26.225 U1.7
VDDIO: C16.1 C52.1 U1.31 U1.42 | length 3.5
  Component Side w0.2: U1.42 C16.1
  Component Side w0.254: U1.31 29.375,26.625 v1(29.6,26.85)
  Solder Side w0.254: C52.1 29.575,26.825 v1(29.6,26.85)
VDDMS: C14.1 U1.6 | length 3.9
  Component Side w0.2: C14.1 19.565,26.215 21.03,26.215 21.119,26.304 21.781,26.304 22.102,26.625 U1.6
VDDSYN: C17.1 U1.10 | length 4
  Component Side w0.2: C17.1 19.575,23.875 20.625,23.875 21.624,24.874 22.108,24.874 22.238,25.004 22.319,25.004 22.34,25.025 U1.10
VDDVCO: C7.1 C8.2 C19.1 U1.11 | length 4.8
  Component Side w0.2: C8.2@20.432,22.976 22.005,24.549 22.243,24.549 22.319,24.625 U1.11
  Component Side w0.254: C19.1 C8.2 C7.1
pads on no net: CN5.1 CN5.8 CN5.9 CN5.10 CN6.1 CN6.2 CN6.5 CN6.8 CN8.4 CN8.5 CN8.6 CN9.1 CN9.2 T1.6 U1.1 U1.2 U1.13 U1.14 U1.Paste1 U1.Paste2 U1.Paste3 U1.Paste4 U1.Paste5 U1.Paste6 U1.Paste7 U1.Paste8 U1.Paste9

## Polygon pours and split planes (outlines as drawn)
GND on Ground Plane (split plane): 50.75,0.51 0.51,0.51 0.51,59.99 50.75,59.99
+3V3 on Power Plane (split plane): 23.076,22.69 23.124,22.671 23.164,22.639 23.196,22.599 23.215,22.551 23.222,22.5 23.215,22.449 23.196,22.401 23.164,22.361 23.124,22.329 23.076,22.31 23.025,22.303 22.974,22.31 22.926,22.329 22.886,22.361 22.854,22.401 22.835,22.449 22.828,22.5 22.835,22.551 22.854,22.599 22.886,22.639 22.926,22.671 22.974,22.69 23.025,22.697
+3V3 on Power Plane (split plane): 26.769,21.188 26.809,21.171 26.844,21.144 26.871,21.109 26.888,21.069 26.894,21.025 26.888,20.981 26.871,20.941 26.844,20.906 26.809,20.879 26.769,20.862 26.725,20.856 26.681,20.862 26.641,20.879 26.606,20.906 26.579,20.941 26.562,20.981 26.556,21.025 26.562,21.069 26.579,21.109 26.606,21.144 26.641,21.171 26.681,21.188 26.725,21.194
+3V3 on Power Plane (split plane): 50.75,0.51 0.51,0.51 0.51,59.99 50.75,59.99

## Other copper
Component Side:
  pour cut-out: 25.728,18.399 25.777,18.396 25.913,18.369 25.96,18.353 26.009,18.343 26.053,18.321 26.1,18.305 26.141,18.278 26.185,18.256 26.301,18.179 26.338,18.146 26.379,18.119 26.383,18.115 26.408,18.104 26.564,17.984 26.684,17.828 26.76,17.646 26.785,17.45 26.785,17.15 26.76,16.954 26.74,16.908 26.74,6.255 26.775,6.255 26.971,6.23 27.153,6.154 27.309,6.034 27.429,5.878 27.505,5.696 27.53,5.5 27.53,0.5 27.505,0.304 27.429,0.122 27.309,-0.034 27.153,-0.154 26.971,-0.23 26.775,-0.255 24.485,-0.255 24.289,-0.23 24.107,-0.154 23.951,-0.034 23.831,0.122 23.755,0.304 23.73,0.5 23.73,5.5 23.755,5.696 23.831,5.878 23.951,6.034 24.107,6.154 24.289,6.23 24.485,6.255 24.52,6.255 24.52,16.908 24.5,16.954 24.475,17.15 24.475,17.45 24.5,17.646 24.576,17.828 24.696,17.984 24.852,18.104 24.877,18.115 24.881,18.119 24.922,18.146 24.959,18.179 25.075,18.256 25.119,18.278 25.16,18.305 25.207,18.321 25.251,18.343 25.3,18.353 25.347,18.369 25.483,18.396 25.532,18.399 25.581,18.409 25.63,18.405 25.679,18.409
Power Plane (plane layer: these items are gaps in the copper):
  circle w0.34: c26.725,21.025 r0.34
  circle w0.254: c23.025,22.5 r0.325

## Silkscreen, mask and mechanical layers (free items; w line width, h text height)
Top Overlay 1:
  text "SCL/D15 / SDA/D14 / AVD0 / GND / SCK/D13 / MISO/D12 / MOSI/D11 / CS/D10 / D9 / D8" at 35.9,35.1 h1.6
  text "IOREF / NRST / 3V3 / 5V / GND / GND / VIN" at 3,31 h1.6
  text "A0 / A1 / A2 / A3 / A4 / A5" at 3.5,13.3 h1.6
  text "D7 / D6 / D5 / D4 / D3 / D2 / TX/D1 / RX/D0" at 40.1,13 h1.6
Top Paste:
  the board outline again, w0.254
Top Solder:
  region: 23.75,22.975 23.75,19.4 22.65,19.4 21.9,18.65 21.9,17.375 22.825,16.45 22.825,7.15 20.175,7.15 18.925,5.9 18.925,0.525 32.8,0.525 32.8,6.175 31.825,7.15 28.325,7.15 28.325,16.875 28.325,18.71 27.55,19.4 26.25,19.4 26.25,22.975